# Altium PCB Keyboard.PcbDoc
Units mil, origin at the board's own origin, x right, y up, seen from the top; angles counter-clockwise.
Board outline 5753.22 x 3798.75 mil, 2 copper layers (Component Side, Bottom Layer), stack 12.8 mil thick; 43 components, 20 nets, 460 pads, 19 vias.
Unrouted connection lines stored in the file: 107.
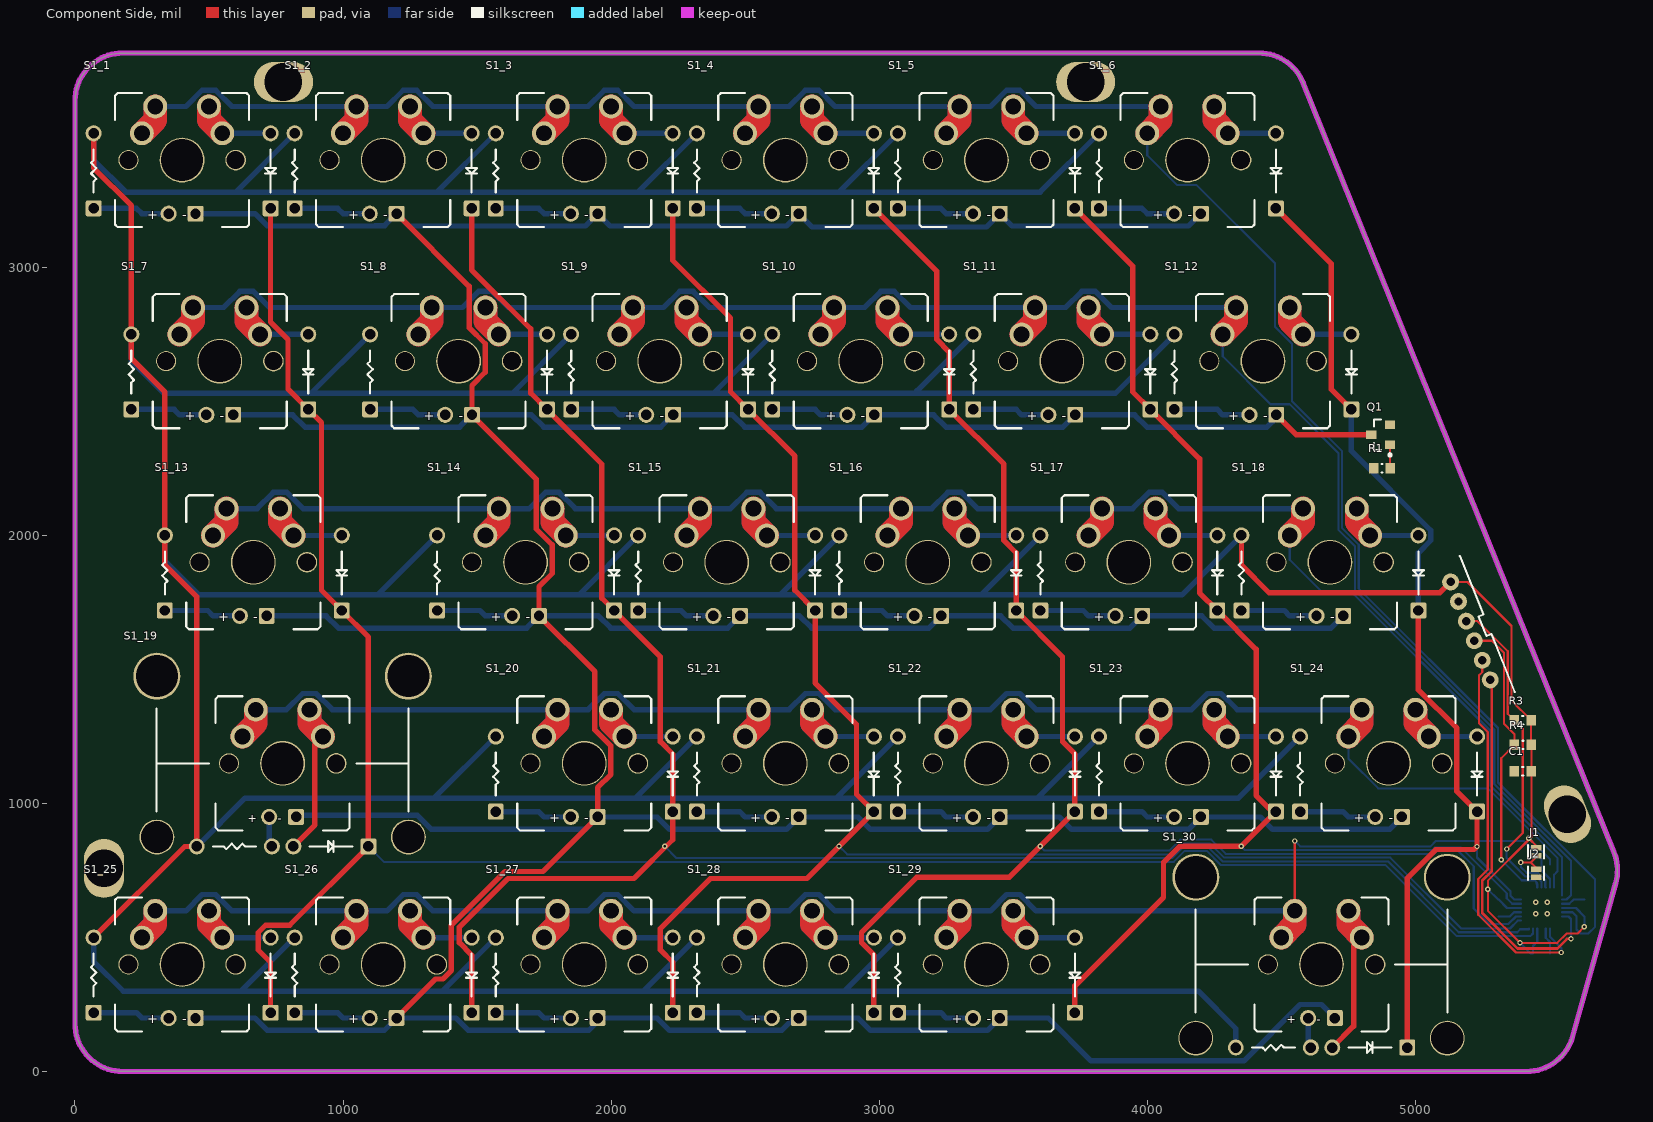
[diagram p0: Component Side view]
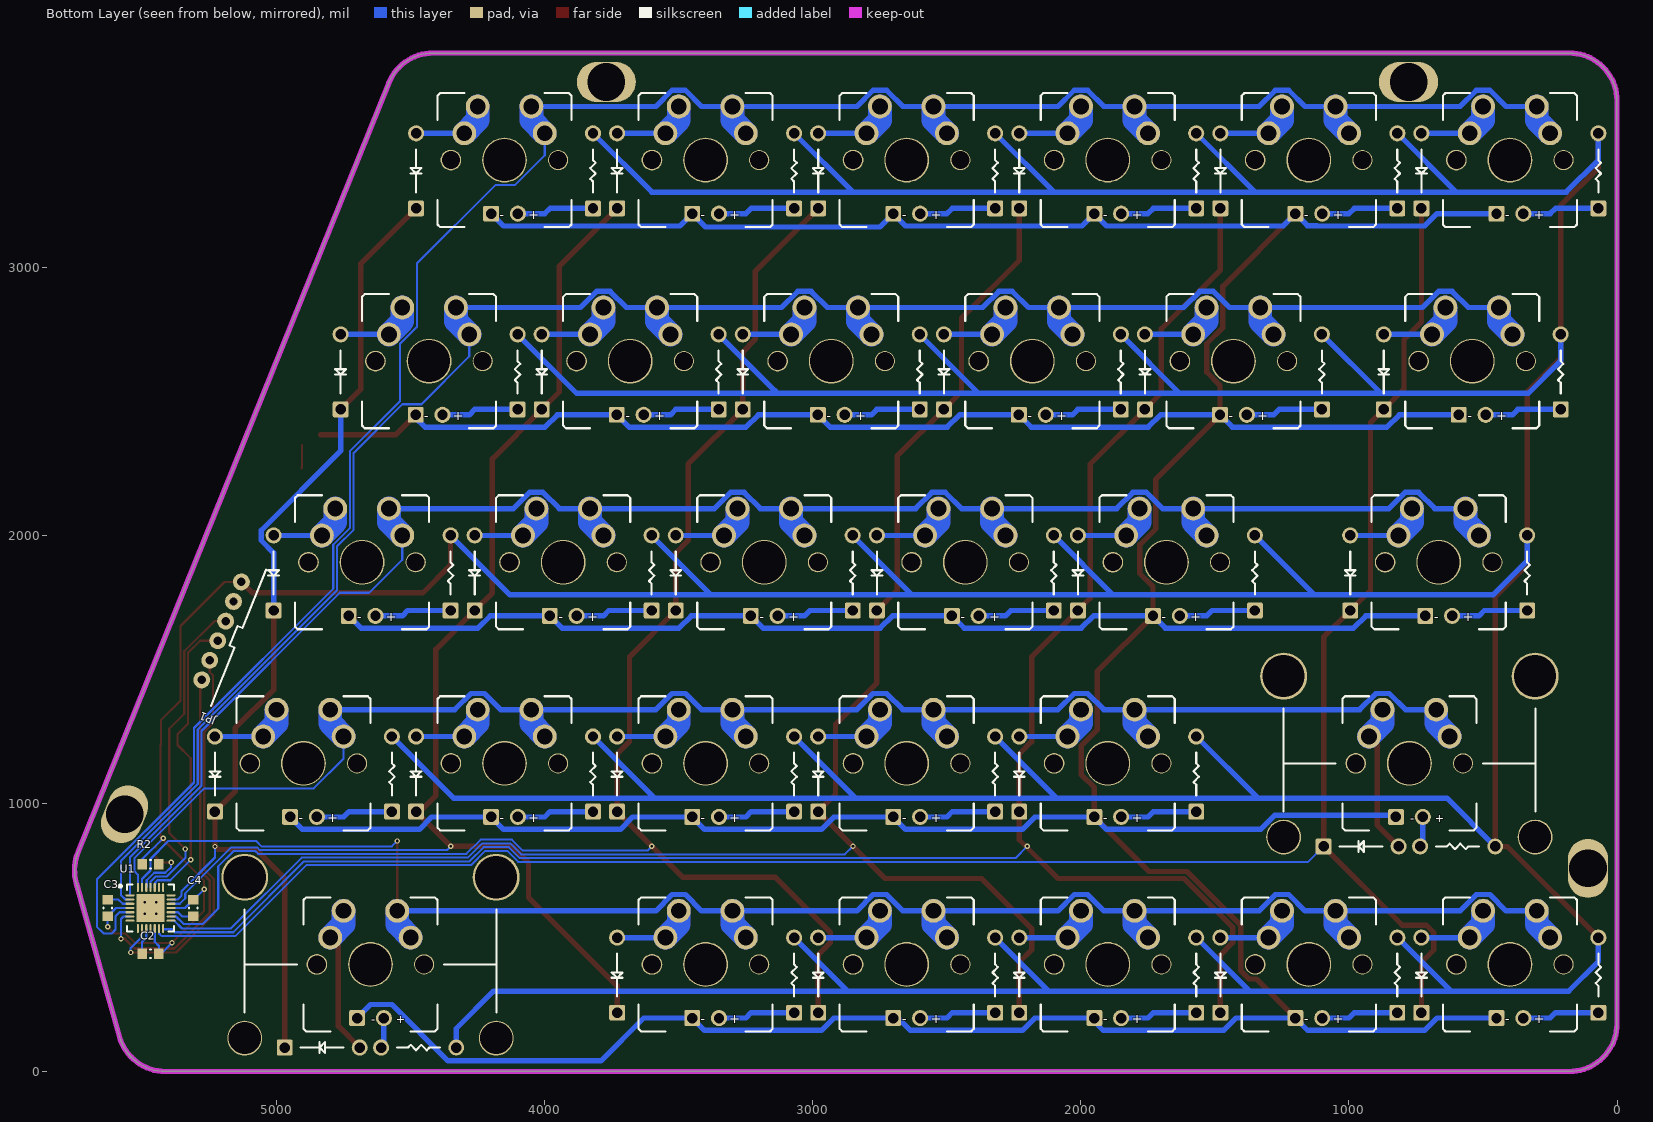
[diagram p1: Bottom Layer view, seen from below]
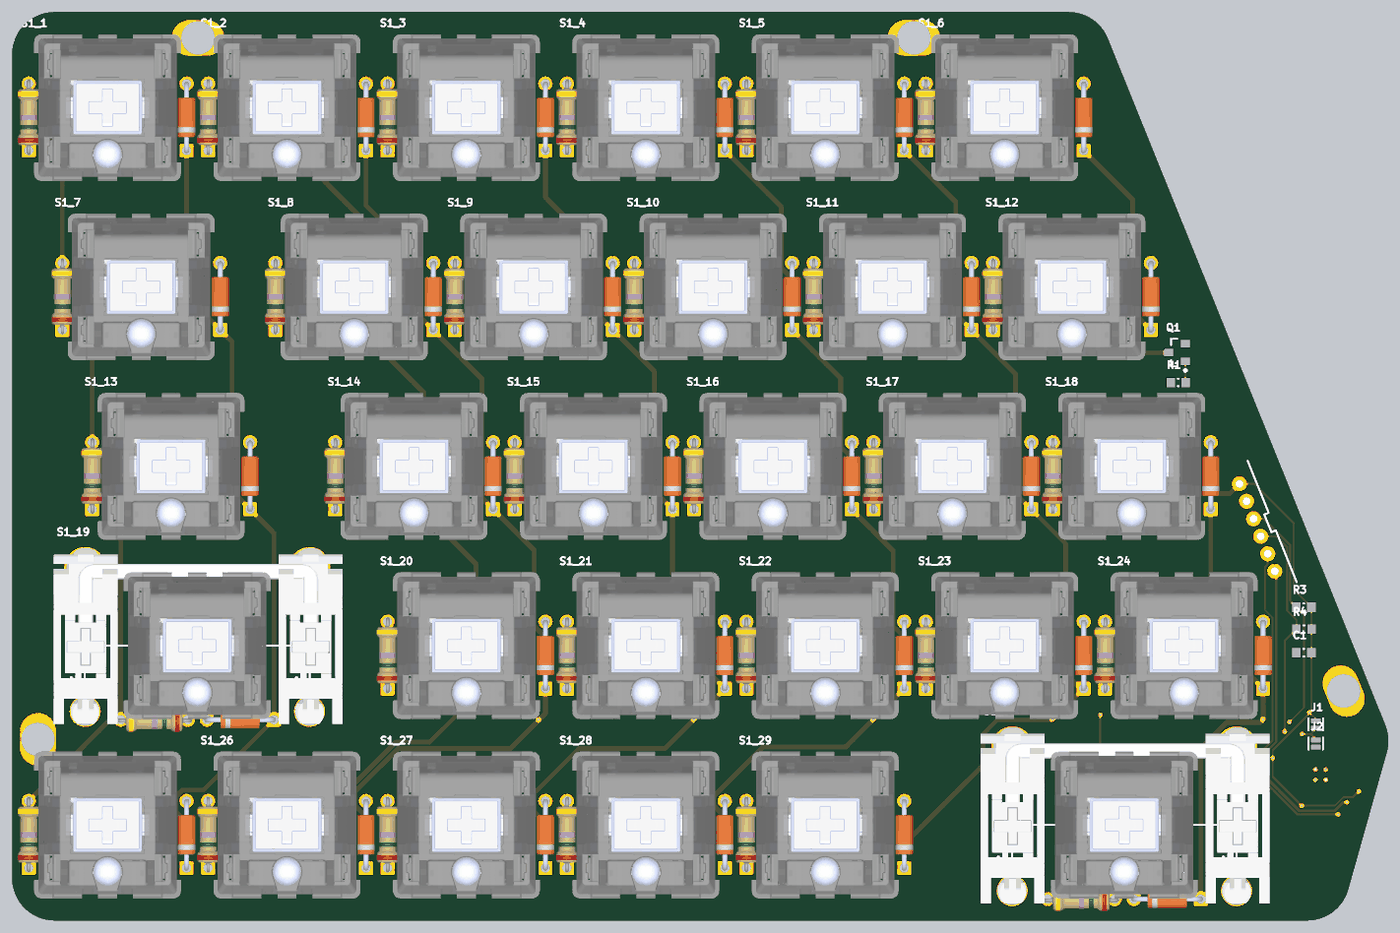
[diagram p2: 3D render of the assembled board from above, using the file's embedded part models]

## Layer stack, top to bottom
Top Solder: solder mask 0.4, Solder Resist, Dk 3.5
Component Side: signal copper 1.4
Dielectric 1: core 10, FR-4, Dk 4.2
Bottom Layer: signal copper 1.4
Solder Side: solder mask 0.4, Solder Resist, Dk 3.5

## Board outline
177.75,0.25 cw(c177.75,177.75) 0.25,177.75 0.25,3621.5 cw(c177.75,3621.5) 177.75,3799 4416.26,3799 cw(c4416.26,3621.5) 4580.83,3687.99 5740.58,817.51 cw(c5576,751.02) 5746.88,702.98 5585.7,129.71 cw(c5414.83,177.75) 5414.83,0.25

## Design rules (kind name [scope] priority, off if disabled: settings)
Clearance [All] p1: gap=6 ignorepadtopadclearanceinfootprint=FALSE except(0: Arc-Hole Track-Hole SMDPad-Hole THPad-Hole Via-Hole Fill-Hole Poly-Hole Region-Hole Text-Hole)
ComponentClearance [All] p1: gap=6 collisioncheckmode=3 verticalgap=10 showdistances=FALSE
PolygonConnect [All] p1: connectstyle=Relief reliefconductorwidth=10 reliefentries=4 polygonreliefangle="90 Angle" airgapwidth=10
RoutingVias [All] p1: holewidth=28 width=50 viastyle="Through Hole" minholewidth=28 minwidth=50 maxholewidth=28 maxwidth=50
SolderMaskExpansion [All] p1: expansion=3
Width [All] p1: maxlimit=1000 minlimit=6 preferedwidth=8 minimp=50.000000 maximp=50.000000 favimp=50.000000
29 further rules are at their usual default settings.

## Classes and differential pairs
component class Keyboard: C1 C2 C3 C4 C? J1 J2 JP1 Q1 R1 R2 R3 R4 U1
channel class Row: Switch1 Switch2 Switch3 Switch4 Switch5
net class ROW[1..5]: ROW1 ROW2 ROW3 ROW4 ROW5
net class COL[1..6]: COL1 COL2 COL3 COL4 COL5 COL6
component class Switch30: S1_30
component class Switch29: S1_29
component class Switch28: S1_28
component class Switch27: S1_27
component class Switch26: S1_26
component class Switch25: S1_25
component class Switch24: S1_24
component class Switch23: S1_23
component class Switch22: S1_22
component class Switch21: S1_21
component class Switch20: S1_20
component class Switch19: S1_19
component class Switch18: S1_18
component class Switch17: S1_17
component class Switch16: S1_16
component class Switch15: S1_15
component class Switch14: S1_14
component class Switch13: S1_13
component class Switch12: S1_12
component class Switch11: S1_11
component class Switch10: S1_10
component class Switch9: S1_9
component class Switch8: S1_8
component class Switch7: S1_7
component class Switch6: S1_6
component class Switch5: S1_5
component class Switch4: S1_4
component class Switch3: S1_3
component class Switch2: S1_2
component class Switch1: S1_1
channel class Switch: Switch

## Components (designator, comment, footprint, x,y, rotation, side; value= is the part's Value field where it differs from the comment)
C1 "2.2uF" CAPC0603(1608)100_N 5400,1120 r180 top
C2 "0.1uF" CAPC0603(1608)100_N 5470,440 r180 bottom value=100nF
C3 "0.1uF" CAPC0603(1608)100_N 5630,610 r270 bottom value=100nF
C4 "0.1uF" CAPC0603(1608)100_N 5310,610 r90 bottom value=100nF
J1 "ADDR_H" "SOLDER JUMPER" 5450,820 r90 top
J2 "ADDR_L" "SOLDER JUMPER" 5450,740 r90 top
JP1 "JST_PH_6_VERT" JST_PH_6_MIRRORABLE 5204.85,1643.26 r112 bottom
Q1 "IRLML2502TRPBF" INTR-SOT-23-3_V 4870,2375 r90 top
R1 "10K" RESC0603(1608)_N 4875,2250 r0 top value="10000.00 Ohm"
R2 "10K" RESC0603(1608)_N 5470,773 r0 bottom value="10000.00 Ohm"
R3 "10K" RESC0603(1608)_N 5400,1310 r180 top value="10000.00 Ohm"
R4 "10K" RESC0603(1608)_N 5400.8,1218.2 r180 top value="10000.00 Ohm"
S1_1 "CherryMX" CHERRYMX_MIRRORABLE 399.62,3399.62 r0 top locked (schematic designator S1)
S1_2 "CherryMX" CHERRYMX_MIRRORABLE 1149.62,3399.62 r0 top locked (schematic designator S1)
S1_3 "CherryMX" CHERRYMX_MIRRORABLE 1899.62,3399.62 r0 top locked (schematic designator S1)
S1_4 "CherryMX" CHERRYMX_MIRRORABLE 2649.62,3399.62 r0 top locked (schematic designator S1)
S1_5 "CherryMX" CHERRYMX_MIRRORABLE 3399.62,3399.62 r0 top locked (schematic designator S1)
S1_6 "CherryMX" CHERRYMX_MIRRORABLE 4149.62,3399.62 r0 top locked (schematic designator S1)
S1_7 "CherryMX" CHERRYMX_MIRRORABLE 540.25,2649.62 r0 top locked (schematic designator S1)
S1_8 "CherryMX" CHERRYMX_MIRRORABLE 1430.88,2649.62 r0 top locked (schematic designator S1)
S1_9 "CherryMX" CHERRYMX_MIRRORABLE 2180.88,2649.62 r0 top locked (schematic designator S1)
S1_10 "CherryMX" CHERRYMX_MIRRORABLE 2930.88,2649.62 r0 top locked (schematic designator S1)
S1_11 "CherryMX" CHERRYMX_MIRRORABLE 3680.88,2649.62 r0 top locked (schematic designator S1)
S1_12 "CherryMX" CHERRYMX_MIRRORABLE 4430.88,2649.62 r0 top locked (schematic designator S1)
S1_13 "CherryMX" CHERRYMX_MIRRORABLE 665.25,1899.62 r0 top locked (schematic designator S1)
S1_14 "CherryMX" CHERRYMX_MIRRORABLE 1680.88,1899.62 r0 top locked (schematic designator S1)
S1_15 "CherryMX" CHERRYMX_MIRRORABLE 2430.88,1899.62 r0 top locked (schematic designator S1)
S1_16 "CherryMX" CHERRYMX_MIRRORABLE 3180.88,1899.62 r0 top locked (schematic designator S1)
S1_17 "CherryMX" CHERRYMX_MIRRORABLE 3930.88,1899.62 r0 top locked (schematic designator S1)
S1_18 "CherryMX" CHERRYMX_MIRRORABLE 4680.88,1899.62 r0 top locked (schematic designator S1)
S1_19 "CherryMX" CherryMX_2U_Mirrorable 774.62,1149.62 r0 top locked (schematic designator S1)
S1_20 "CherryMX" CHERRYMX_MIRRORABLE 1899.62,1149.62 r0 top locked (schematic designator S1)
S1_21 "CherryMX" CHERRYMX_MIRRORABLE 2649.62,1149.62 r0 top locked (schematic designator S1)
S1_22 "CherryMX" CHERRYMX_MIRRORABLE 3399.62,1149.62 r0 top locked (schematic designator S1)
S1_23 "CherryMX" CHERRYMX_MIRRORABLE 4149.62,1149.62 r0 top locked (schematic designator S1)
S1_24 "CherryMX" CHERRYMX_MIRRORABLE 4899.62,1149.62 r0 top locked (schematic designator S1)
S1_25 "CherryMX" CHERRYMX_MIRRORABLE 399.62,399.62 r0 top locked (schematic designator S1)
S1_26 "CherryMX" CHERRYMX_MIRRORABLE 1149.62,399.62 r0 top locked (schematic designator S1)
S1_27 "CherryMX" CHERRYMX_MIRRORABLE 1899.62,399.62 r0 top locked (schematic designator S1)
S1_28 "CherryMX" CHERRYMX_MIRRORABLE 2649.62,399.62 r0 top locked (schematic designator S1)
S1_29 "CherryMX" CHERRYMX_MIRRORABLE 3399.62,399.62 r0 top locked (schematic designator S1)
S1_30 "CherryMX" CherryMX_2U_Mirrorable 4649.62,399.62 r0 top locked (schematic designator S1)
U1 "SX1509" QFN_UT_28 5470,610 r180 bottom

## Footprints (in the part's own frame and the unit in brackets; to place one, negate y for a bottom-side part, rotate by r counter-clockwise, add the part's x,y. Pads: shape width x height; smd on the part's side, far side on the other; paste and mask are expansions set on the pad)
CAPC0603(1608)100_N [mm] "Chip Capacitor, Body 1.6x0.8mm, Height 1.0mm, IPC Medium Density"
  rect 0.9x1 smd: 1(-0.8,0) 2(0.8,0)
  silkscreen extent -0.05,-0.4 0.05,0.4, body extent -0.87,-0.48 0.88,0.47, height 1
CherryMX_2U_Mirrorable [mil]
  round 130 hole 120: 1(-469,-275) 1(469,-275)
  round 175 hole 157: 1(-469,325) 1(469,325)
  round 75 hole 67: 1(-200,0)
  round 167 hole 157: 1(0,0)
  round 77 hole 67: 1(200,0)
  round 89 hole 59: 2(-150,100) 2(-100,200) ""(100,200) ""(150,100)
  rrect20% 59x59 hole 39: 3(320,-310) 5(50,-200)
  round 59 hole 39: 4(-320,-310)
  round 60 hole 39: ""(-50,-200) ""(-40,-310) ""(40,-310)
  Component Side lines w20: 40,-310 120,-230 120,-50 120,70
  Component Side lines w89: -150,100 -100,150 -100,200 ; 100,200 100,150 150,100
  Bottom Layer lines w20: -50,-200 -50,-300 -40,-310
  Bottom Layer lines w89: -150,100 -100,150 -100,200 ; 100,200 100,150 150,100
  silkscreen extent -470,-330 470,250, body extent -601,-360 608,428, height 620
CHERRYMX_MIRRORABLE [mil]
  round 75 hole 67: 1(-200,0)
  round 167 hole 157: 1(0,0)
  round 77 hole 67: 1(200,0)
  round 89 hole 59: 2(-150,100) 2(-100,200) ""(100,200) ""(150,100)
  rrect20% 59x59 hole 39: 3(330,-180) 5(50,-200) ""(-330,-180)
  round 60 hole 39: 4(-330,100) ""(-50,-200) ""(330,100)
  Component Side lines w89: -150,100 -100,150 -100,200 ; 100,200 100,150 150,100
  Bottom Layer lines w20: -330,-180 -170,-180 -150,-200 -50,-200 ; 150,100 330,100
  Bottom Layer lines w89: -150,100 -100,150 -100,200 ; 100,200 100,150 150,100
  silkscreen extent -340,-250 350,250, body extent -375,-307 366,307, height 620
INTR-SOT-23-3_V [mm] "SOT23, 3-Leads, Body 2.92x1.3mm, Pitch 1.9mm"
  rect 0.802x0.972 smd: 1(-0.95,-0.885) 2(0.95,-0.885) 3(0,0.885)
  silkscreen extent -2.03,-1.01 1.46,0.64, body extent -1.46,-0.65 1.46,0.65, height 1.12
JST_PH_6_MIRRORABLE [mil]
  round 63 hole 31.5: 1(-196.85,0) 2(-118.11,0) 3(-39.37,0) 4(39.63,0) 5(118.63,0) 6(197.37,0)
  silkscreen extent -274,-68 274,-48, body extent -274,-67 274,110, height 236
QFN_UT_28 [mm]
  oval 0.85x0.2 smd: 1(-1.95,1.2) 2(-1.95,0.8) 3(-1.95,0.4) 4(-1.95,0) 5(-1.95,-0.4) 6(-1.95,-0.8) 7(-1.95,-1.2) 15(1.95,-1.2) 16(1.95,-0.8) 17(1.95,-0.4) 18(1.95,0) 19(1.95,0.4) 20(1.95,0.8) 21(1.95,1.2)
  oval 0.2x0.85 smd: 8(-1.2,-1.95) 9(-0.8,-1.95) 10(-0.4,-1.95) 11(0,-1.95) 12(0.4,-1.95) 13(0.8,-1.95) 14(1.2,-1.95) 22(1.2,1.95) 23(0.8,1.95) 24(0.4,1.95) 25(0,1.95) 26(-0.4,1.95) 27(-0.8,1.95) 28(-1.2,1.95)
  rect 2.65x2.65 smd: 29(0,0)
  silkscreen extent -3,-2.22 2.22,2.23, body extent -2.08,-2.08 2.09,2.08, height 0.6
RESC0603(1608)_N [mm] "Chip Resistor, Body 1.6x0.8mm, IPC Medium Density"
  rect 0.9x1 smd: 1(-0.8,0) 2(0.8,0)
  silkscreen extent -0.05,-0.4 0.05,0.4, body extent -0.85,-0.47 0.85,0.47, height 0.6
"SOLDER JUMPER" [mil]
  rrect20% 20x40 smd: 1(-15,0) 2(15,0)
  silkscreen extent -25,-30 25,30

## Part data
C1: library part CMP-1035-02767-1, "CAP 2.2uF 25V ±10% 0603 (1608 Metric) Thickness 1mm SMD", Case-EIA=0603, Case-Metric=1608, Rated Voltage="25 V", Tolerance=±10%, Max Thickness="1 mm", Technology=SMT
C2 C3 C4: library part CMP-1035-02595-1, "CAP 100nF 100V ±10% 0603 (1608 Metric) Thickness 1mm SMD", Case-EIA=0603, Case-Metric=1608, Rated Voltage="100 V", Tolerance=±10%, Max Thickness="1 mm", Technology=SMT
J1 J2: library part "Solder Jumper"
JP1: Manufacturer="JST Sales America Inc.", PartNumber=B6B-PH-K-S(LF)(SN), Mounting Technology="Through Hole", PackageReference=JST-PH
Q1: library part CMP-2000-04985-1, "N-Channel HEXFET(R) Power MOSFET, 20 V VDS, +/- 12 V VGS, 4.2 A, 3-Pin SOT23, RoHS, Tape and Reel", Drain-Source On Resistance-Max=0.045O, Drain-to-Source Voltage [Vdss]=20V, Manufacturer="International Rectifier", Package Description="3-Pin Small Outline Transistor, Body 2.92 x 1.3 mm, Pitch 0.95 mm", Package Reference=SOT-23-3, Rated Power Dissipation=1.25W, Channel Type=N-Channel, Datasheet URL=https://datasheet.ciiva.com/6383/irlml2502pbf-6383216.pdf, Datasheet Version=Apr-14, Manufacturer URL=http://internationalrectifier.com/, Qg Gate Charge=8nC
R1 R2 R3 R4: library part CMP-1012-00098-1, "10K 0.1W 5% 0603 (1608 Metric)  SMD", Case-EIA=0603, Case-Metric=1608, Power="0.1 W", Tolerance="5 %", Technology=SMT
U1: Supplier Part Number 1=947-SX1509BIULTRT, Supplier 1=Mouser, Supplier 2=Digi-Key, Supplier 3=Digi-Key, Supplier Part Number 2=SX1509BIULDKR-ND, Supplier Part Number 3=SX1509BIULCT-ND

## Free pads (board coordinates)
  oval 150x220 hole 140: 33(108.36,757.65)
  oval 220x150 hole 140: ""(777.65,3690.89) ""(3769.78,3690.89)
  oval 220x150 hole 140 rot 112: ""(5566.6,959.53)

## Via types
v1: diameter 20, hole 10, Component Side to Bottom Layer, 19 vias

## Nets (pads, with @x,y where several pads share a name; then routed paths per layer and width w, separated by ;. In a path a pad name is that pad's centre, name@x,y a point inside that pad or via, vN(x,y) a via of type N, cw(c..) or ccw(c..) an arc to the next point about the centre after c; other vN are vias at no path point)
COL1: S1_1.3 S1_7.3 S1_13.3 S1_19.3 S1_25.3 U1.13 | length 7932.1
  Component Side w20: S1_25.3 729.62,407.62 683.62,453.62 683.62,518.68 710.57,545.62 800.62,545.62 S1_19.3 1094.62,1620.25 S1_13.3 919.75,1795.12 919.75,2420.12 S1_7.3 794.75,2545.12 794.75,2730.68 729.62,2795.81 S1_1.3
  Bottom Layer w8: S1_19.3 1152.25,782 4098.7,782 4139.82,823.12 4221.43,823.12 4274.55,770 4888.7,770 5153.7,505 5428.45,505 5438.5,515.06 U1.13
COL2: S1_2.3 S1_8.3 S1_14.3 S1_20.3 S1_26.3 U1.14 | length 7331.1
  Component Side w20: S1_26.3 1479.62,434.57 1433.62,480.57 1433.62,538.62 1615,720 2085,720 2229.62,864.62 S1_20.3 2229.62,1184.57 2183.62,1230.57 2183.62,1546.88 S1_14.3 1964.88,1765.62 1964.88,2265.62 S1_8.3 1700,2530.5 1700,2770 1479.62,2990.38 S1_2.3
  Bottom Layer w8: v1(2200,840) 2244,796 4092.9,796 4134.03,837.12 4227.22,837.12 4280.35,784 4897.32,784 5161.54,519.79 5379.79,519.79 5391.02,531.02 5422.76,531.02 U1.14
COL3: S1_3.3 S1_9.3 S1_15.3 S1_21.3 S1_27.3 U1.15 | length 6586.4
  Component Side w20: S1_27.3 2229.62,407.62 2183.62,453.62 2183.62,533.62 2370,720 2730,720 v1(2850,840) S1_21.3 2915,1034.25 2915,1295 2760.88,1449.12 S1_15.3 2685.38,1795.12 2685.38,2295.12 S1_9.3 2445,2535.5 2445,2810 2229.62,3025.38 S1_3.3
  Bottom Layer w8: v1(2850,840) 2880,810 4087.1,810 4128.23,851.12 4233.02,851.12 4286.15,798 4905.95,798 5170.16,533.79 5352.58,533.79 5381.55,562.76 U1.15
COL4: S1_4.3 S1_10.3 S1_16.3 S1_22.3 S1_28.3 U1.16 | length 5920.8
  Component Side w20: S1_28.3 2979.62,434.57 2933.62,480.57 2933.62,518.68 3139.95,725 3485,725 v1(3600,840) S1_22.3 3729.62,1184.57 3683.62,1230.57 3683.62,1546.88 S1_16.3 3510.88,1934.57 3464.88,1980.57 3464.88,2265.62 S1_10.3 3260.88,2684.57 3214.88,2730.57 3214.88,2984.38 S1_4.3
  Bottom Layer w8: v1(3600,840) 3616,824 4081.3,824 4122.43,865.12 4238.82,865.12 4291.95,812 5068.11,812 5078.24,822.12 5160.43,822.12 5217.12,765.42 5217.12,607.88 5274.21,550.79 5346.96,550.79 5374.67,578.5 U1.16
COL5: S1_5.3 S1_11.3 S1_17.3 S1_23.3 S1_29.3 U1.19 | length 4915.6
  Component Side w20: S1_29.3 3729.62,319.62 4060,650 4060,780 4120,840 v1(4350,840) S1_23.3 4465.38,969.62 4405.5,1029.5 4405.5,1575 S1_17.3 4195,1785.5 4195,2285.5 S1_11.3 3945,2535.5 3945,3004.25 S1_5.3
  Bottom Layer w8: v1(4350,840) 4364,826 5062.32,826 5072.44,836.12 5169.05,836.12 5340.69,664.49 5340.69,645.98 5360.92,625.75 U1.19
COL6: S1_6.3 S1_12.3 S1_18.3 S1_24.3 S1_30.3 U1.20 | length 3950.3
  Component Side w20: S1_6.3 4685.38,3013.88 4685.38,2545.12 S1_12.3 ; S1_30.3 4969.62,722 5075.75,828.12 5218.12,828.12 v1(5229.62,839.62) S1_24.3 5154.12,1045.12 5154.12,1280.68 5010.88,1423.93 S1_18.3
  Bottom Layer w8: v1(5229.62,839.62) 5229.62,798.18 5354.69,673.12 5354.69,655.16 5368.35,641.5 U1.20
  Bottom Layer w20: S1_12.3 4760.88,2314.68 5056.88,2018.68 5056.88,1980.57 5010.88,1934.57 S1_18.3
GND: C1.2 C2.1 C3.1 C4.1 J2.1 JP1.5 Q1.2 R1.1 S1_1.1 S1_2.1 S1_3.1 S1_4.1 S1_5.1 S1_6.1 S1_7.1 S1_8.1 S1_9.1 S1_10.1 S1_11.1 S1_12.1 S1_13.1 S1_14.1 S1_15.1 S1_16.1 S1_17.1 S1_18.1 S1_19.1 S1_20.1 S1_21.1 S1_22.1 S1_23.1 S1_24.1 S1_25.1 S1_26.1 S1_27.1 S1_28.1 S1_29.1 S1_30.1 U1.3 U1.10 U1.17 | length 279.1
  Bottom Layer w8: C4.1 5352.05,578.5 5367.54,594 U1.17@5393.23,594 ; U1.10 5485.75,499.25 5501.5,483.5 C2.1 ; U1.3 5574.09,625.75 5589.84,641.5 C3.1
LED_GATE: JP1.1 Q1.1 R1.2 U1.6 | length 1487
  Component Side w8: Q1.1 4904.84,2251.65 R1.2
  Component Side w10: JP1.1 5284.62,1454.7 5284.62,747.55 5249,711.93 5249,591.3 5381.3,459 5529.3,459 5565.3,495 v1(5580,495)
  Bottom Layer w8: U1.6 5570.79,578.5 5580,569.3 v1(5580,495)
NetJ1_1: J1.1 J2.2 U1.26 | length 253.9
  Component Side w8: v1(5393.23,780) 5430,780 ; J2.2 5450,760 5430,780 ; J1.1@5450,800 5430,780
  Bottom Layer w8: v1(5393.23,780) 5393.23,763.16 5414.88,741.5 5455.87,741.5 5484,713.38 5484,688.52 U1.26
NetQ1_3: Q1.3 S1_1.5 S1_2.5 S1_3.5 S1_4.5 S1_5.5 S1_6.5 S1_7.5 S1_8.5 S1_9.5 S1_10.5 S1_11.5 S1_12.5 S1_13.5 S1_14.5 S1_15.5 S1_16.5 S1_17.5 S1_18.5 S1_19.5 S1_20.5 S1_21.5 S1_22.5 S1_23.5 S1_24.5 S1_25.5 S1_26.5 S1_27.5 S1_28.5 S1_29.5 S1_30.5 | length 25373.9
  Component Side w20: S1_26.5 1345.12,345.12 1372.2,345.12 1404.12,377.05 1404.12,545.89 1604.23,746 1746,746 S1_20.5 1949.62,1058.91 1999.12,1108.41 1999.12,1214.57 1939.12,1274.57 1939.12,1491.38 S1_14.5 1730.88,1808.91 1780.38,1858.41 1780.38,1964.57 1720.38,2024.57 1720.38,2210.12 S1_8.5 1480.88,2558.91 1530.38,2608.41 1530.38,2714.57 1470.38,2774.57 1470.38,2928.88 S1_2.5 ; S1_12.5 4555.5,2375 Q1.3
  Bottom Layer w20: S1_25.5 671.45,199.62 717.45,153.62 1153.62,153.62 S1_26.5 1421.45,199.62 1467.45,153.62 1916.38,153.62 1949.62,186.88 S1_27.5 2171.45,199.62 2217.45,153.62 2636,153.62 2682,199.62 S1_28.5 2921.45,199.62 2967.45,153.62 3403.62,153.62 S1_29.5 3630.38,199.62 3790,40 4359.62,40 4569.62,250 4649.25,250 S1_30.5 ; S1_1.5 671.45,3199.62 717.45,3153.62 1118.68,3153.62 1120.05,3155 1155,3155 S1_2.5 1245.62,3153.62 1903.62,3153.62 S1_3.5 1995.62,3153.62 2653.62,3153.62 S1_4.5 2749.25,3150 3400,3150 S1_5.5 3495.62,3153.62 4153.62,3153.62 S1_6.5 ; S1_7.5 812.08,2449.62 858.08,2403.62 1434.88,2403.62 S1_8.5 1702.7,2449.62 1748.7,2403.62 2184.88,2403.62 S1_9.5 2452.7,2449.62 2498.7,2403.62 2934.88,2403.62 S1_10.5 3202.7,2449.62 3248.7,2403.62 3684.88,2403.62 S1_11.5 3952.7,2449.62 3998.7,2403.62 4446.38,2403.62 4480.88,2438.12 S1_12.5 ; S1_13.5 937.08,1699.62 983.08,1653.62 1684.88,1653.62 S1_14.5 1952.7,1699.62 1998.7,1653.62 2434.88,1653.62 S1_15.5 2702.7,1699.62 2748.7,1653.62 3184.88,1653.62 S1_16.5 3452.7,1699.62 3498.7,1653.62 3934.88,1653.62 S1_17.5 4202.7,1699.62 4248.7,1653.62 4684.88,1653.62 S1_18.5 ; S1_19.5 824.62,955.62 1277.18,955.62 1329.18,903.62 1903.62,903.62 S1_20.5 2171.45,949.62 2217.45,903.62 2653.62,903.62 S1_21.5 2921.45,949.62 2967.45,903.62 3403.62,903.62 S1_22.5 3671.45,949.62 3717.45,903.62 4153.62,903.62 S1_23.5 4421.45,949.62 4467.45,903.62 4903.62,903.62 S1_24.5
NetR2_1: R2.1 U1.23
NINT: JP1.2 U1.9 | length 1457.1
  Component Side w8: JP1.2 5249.09,1489.93 5237.09,1477.93 5237.09,1298.73 5269.62,1266.19 5269.62,753.77 5234,718.14 5234,585.09 5375.09,444 v1(5544,444)
  Bottom Layer w8: U1.9 5501.5,503.3 5544,460.8 v1(5544,444)
ROW1: S1_1.2 S1_2.2 S1_3.2 S1_4.2 S1_5.2 S1_6.2 U1.5 | length 7890.6
  Bottom Layer w8: S1_6.2@3999.62,3499.62 3999.62,3417.4 4110.9,3306.12 4183.88,3306.12 4476.38,3013.62 4476.38,2777.05 4540,2713.43 4540,2499.42 4726.38,2313.05 4726.38,2027.05 4788.38,1965.05 4788.38,1801.22 5308,1281.6 5308,1078.2 5670,716.2 5670,540 5645,515 5615,515 5600.31,529.69 5600.31,579.69 5585.75,594.25 U1.5
  Bottom Layer w20: S1_1.2@299.62,3599.62 414.07,3599.62 474.57,3660.12 524.68,3660.12 585.18,3599.62 1049.62,3599.62 1164.07,3599.62 1224.57,3660.12 1274.68,3660.12 1335.18,3599.62 1799.62,3599.62 1914.07,3599.62 1974.57,3660.12 2024.68,3660.12 2085.18,3599.62 2549.62,3599.62 2664.07,3599.62 2724.57,3660.12 2774.68,3660.12 2835.18,3599.62 3299.62,3599.62 3414.07,3599.62 3474.57,3660.12 3524.68,3660.12 3585.18,3599.62 S1_6.2@4049.62,3599.62
ROW2: S1_7.2 S1_8.2 S1_9.2 S1_10.2 S1_11.2 S1_12.2 U1.2 | length 6852.9
  Bottom Layer w8: S1_12.2@4280.88,2749.62 4280.88,2667.4 4459.15,2489.12 4530.5,2489.12 4712.38,2307.25 4712.38,2021.25 4774.38,1959.25 4774.38,1795.42 5294,1275.8 5294,1072.4 5580.09,786.32 5580.09,658.06 5563.53,641.5 U1.2
  Bottom Layer w20: S1_7.2@440.25,2849.62 554.69,2849.62 615.19,2910.12 665.31,2910.12 725.81,2849.62 1330.88,2849.62 1445.32,2849.62 1505.82,2910.12 1555.93,2910.12 1616.43,2849.62 2080.88,2849.62 2195.32,2849.62 2255.82,2910.12 2305.93,2910.12 2366.43,2849.62 2830.88,2849.62 2945.32,2849.62 3005.82,2910.12 3055.93,2910.12 3116.43,2849.62 3580.88,2849.62 3695.32,2849.62 3755.82,2910.12 3805.93,2910.12 3866.43,2849.62 S1_12.2@4330.88,2849.62
ROW3: S1_13.2 S1_14.2 S1_15.2 S1_16.2 S1_17.2 S1_18.2 U1.1 | length 6093.8
  Bottom Layer w8: S1_18.2@4530.88,1999.62 4530.88,1909.12 4654.4,1785.6 4764.4,1785.6 5280,1270 5280,1066.61 5546.77,799.83 U1.1
  Bottom Layer w20: S1_13.2@565.25,2099.62 679.69,2099.62 740.19,2160.12 790.31,2160.12 850.81,2099.62 1580.88,2099.62 1695.32,2099.62 1755.82,2160.12 1805.93,2160.12 1866.43,2099.62 2330.88,2099.62 2445.32,2099.62 2505.82,2160.12 2555.93,2160.12 2616.43,2099.62 3080.88,2099.62 3195.32,2099.62 3255.82,2160.12 3305.93,2160.12 3366.43,2099.62 3830.88,2099.62 3945.32,2099.62 4005.82,2160.12 4055.93,2160.12 4116.43,2099.62 S1_18.2@4580.88,2099.62
ROW4: S1_19.2 S1_20.2 S1_21.2 S1_22.2 S1_23.2 S1_24.2 U1.28 | length 5505.9
  Bottom Layer w8: S1_24.2@4749.62,1249.62 4749.62,1167.4 4860.9,1056.12 5269.91,1056.12 5529.21,796.83 5529.21,746.17 5517.24,734.2 U1.28
  Bottom Layer w20: S1_19.2@674.62,1349.62 789.07,1349.62 849.57,1410.12 899.68,1410.12 960.18,1349.62 1799.62,1349.62 1914.07,1349.62 1974.57,1410.12 2024.68,1410.12 2085.18,1349.62 2549.62,1349.62 2664.07,1349.62 2724.57,1410.12 2774.68,1410.12 2835.18,1349.62 3299.62,1349.62 3414.07,1349.62 3474.57,1410.12 3524.68,1410.12 3585.18,1349.62 4049.62,1349.62 4164.07,1349.62 4224.57,1410.12 4274.68,1410.12 4335.18,1349.62 S1_24.2@4799.62,1349.62
ROW5: S1_25.2 S1_26.2 S1_27.2 S1_28.2 S1_29.2 S1_30.2 U1.27 | length 5844.7
  Component Side w8: S1_30.2@4549.62,599.62 v1(4549.62,860)
  Bottom Layer w8: v1(4549.62,860) 4569.62,840 5056.52,840 5076.14,859.62 5403.42,859.62 5470,793.05 5470,749.95 5501.5,718.46 U1.27
  Bottom Layer w20: S1_25.2@299.62,599.62 414.07,599.62 474.57,660.12 524.68,660.12 585.18,599.62 1049.62,599.62 1164.07,599.62 1224.57,660.12 1274.68,660.12 1335.18,599.62 1799.62,599.62 1914.07,599.62 1974.57,660.12 2024.68,660.12 2085.18,599.62 2549.62,599.62 2664.07,599.62 2724.57,660.12 2774.68,660.12 2835.18,599.62 3299.62,599.62 3414.07,599.62 3474.57,660.12 3524.68,660.12 3585.18,599.62 S1_30.2@4549.62,599.62
SCL: JP1.4 R3.2 U1.25 | length 1207.3
  Component Side w8: JP1.4 5231.61,1680 5344,1567.61 5344,1334.5 R3.2 5400,1278.5 5400,890 v1(5340,830)
  Bottom Layer w8: v1(5340,830) 5340,796.58 5409.08,727.5 5450.08,727.5 5470,707.58 U1.25
SDA: JP1.3 R4.2 U1.24 | length 1124.4
  Component Side w8: JP1.3 5285.06,1606.75 5330,1561.81 5330,1296.96 5369.3,1257.66 R4.2 5320,1168.9 v1(5320,790)
  Bottom Layer w8: v1(5320,790) 5396.5,713.5 5444.28,713.5 5452.44,705.34 5452.44,700.28 5454.25,698.47 U1.24
VCC: C1.1 C2.2 C3.2 C4.2 J1.2 JP1.6 R2.2 R3.1 R4.1 S1_1.4 S1_2.4 S1_3.4 S1_4.4 S1_5.4 S1_6.4 S1_7.4 S1_8.4 S1_9.4 S1_10.4 S1_11.4 S1_12.4 S1_13.4 S1_14.4 S1_15.4 S1_16.4 S1_17.4 S1_18.4 S1_19.4 S1_20.4 S1_21.4 S1_22.4 S1_23.4 S1_24.4 S1_25.4 S1_26.4 S1_27.4 S1_28.4 S1_29.4 S1_30.4 U1.4 U1.12 U1.18 | length 34149.9
  Component Side w8: JP1.6 5193.75,1826.25 5358.1,1661.9 5358.1,1383.4 R3.1 5431.5,1219 R4.1 5432.29,874.01 ; v1(5422.76,870) v1@5425.52,867.24 ; J1.2 5450,842.76 v1@5425.52,867.24 ; v1(5630,540) 5605,515 5564.09,515 5529.09,480 v1(5390,480) 5270,600 v1(5270,680) 5270,711.72 v1@5425.52,867.24
  Component Side w20: S1_25.4 409.62,839.62 S1_19.4 454.62,1770.62 335.25,1890 S1_13.4 335.25,2534.75 210.25,2659.75 S1_7.4 210.25,3229.75 69.62,3370.38 S1_1.4 ; S1_18.4 4350.88,1889.12 4454.5,1785.5 5090.16,1785.5 JP1.6
  Bottom Layer w8: v1(5270,680) 5308.5,641.5 C4.2 5341.5,610 U1.18 ; v1(5390,480) 5430,440 C2.2 5438.5,468.5 5454.25,484.25 U1.12 ; v1(5422.76,870) 5501.5,791.26 R2.2 ; U1.4 5598.5,610 C3.2 v1(5630,540)
  Bottom Layer w20: S1_25.4 69.62,410.62 180.12,300.12 620.12,300.12 ; S1_1.4 69.62,3400.38 190,3280 600,3280 ; S1_7.4 210.25,2649.88 330.12,2530 881.25,2530 ; S1_13.4 335.25,1904.75 461.99,1778.01 1129.26,1778.01 ; S1_19.4 635,1020 1340,1020 ; S1_26.4 620.12,300.12 ; S1_2.4 600,3280 ; S1_8.4 881.25,2530 ; S1_14.4 1129.26,1778.01 ; S1_27.4 1370.12,300.12 ; S1_20.4 1340,1020 ; S1_3.4 1350,3280 ; S1_9.4 1631.25,2530 ; S1_15.4 1879.26,1778.01 ; S1_28.4 2120.12,300.12 ; S1_21.4 2090,1020 ; S1_4.4 2100,3280 ; S1_10.4 2381.25,2530 ; S1_16.4 2629.26,1778.01 ; S1_29.4 2870.12,300.12 ; S1_22.4 2840,1020 ; S1_5.4 2850,3280 ; S1_11.4 3140,2538.75 3140,2530 ; S1_17.4 3379.26,1778.01 ; S1_23.4 3590,1020 ; S1_6.4 3600,3280 2850,3280 ; S1_12.4 3881.25,2530 3140,2530 ; S1_30.4 4329.62,160.38 4189.88,300.12 2870.12,300.12 ; S1_18.4 4129.26,1778.01 3379.26,1778.01 ; S1_24.4 4340,1020 3590,1020 ; 600,3280 1350,3280 ; 620.12,300.12 1370.12,300.12 ; 881.25,2530 1631.25,2530 ; 1129.26,1778.01 1879.26,1778.01 ; 1340,1020 2090,1020 ; 1350,3280 2100,3280 ; 1370.12,300.12 2120.12,300.12 ; 1631.25,2530 2381.25,2530 ; 1879.26,1778.01 2629.26,1778.01 ; 2090,1020 2840,1020 ; 2100,3280 2850,3280 ; 2120.12,300.12 2870.12,300.12 ; 2381.25,2530 3140,2530 ; 2629.26,1778.01 3379.26,1778.01 ; 2840,1020 3590,1020
pads on no net: S1_1. S1_2. S1_3. S1_4. S1_5. S1_6. S1_7. S1_8. S1_9. S1_10. S1_11. S1_12. S1_13. S1_14. S1_15. S1_16. S1_17. S1_18. S1_19. S1_20. S1_21. S1_22. S1_23. S1_24. S1_25. S1_26. S1_27. S1_28. S1_29. S1_30. U1.7 U1.8 U1.11 U1.21 U1.22 U1.29
copper on no net:
  other v1: 5448.35,588.35 5491.65,588.35 5448.35,631.65 5491.65,631.65

## Keep-outs
Keep-Out Layer:
  lines w20: 4580.83,3687.99 ccw(c4416.26,3621.5) 4416.26,3799 177.75,3799 ccw(c177.75,3621.5) 0.25,3621.5 0.25,177.75 ccw(c177.75,177.75) 177.75,0.25 5414.83,0.25 ccw(c5414.83,177.75) 5585.7,129.71 ; 4580.83,3687.99 5740.58,817.51 ; 4580.83,3687.99 4580.83,3687.99 ; 5585.7,129.71 5585.7,129.71 ; 5585.7,129.71 5746.88,702.98 ccw(c5576,751.02) 5740.58,817.51 ; 5740.58,817.51 5740.58,817.51

## Silkscreen, mask and mechanical layers (free items; w line width, h text height)
Mechanical 1:
  circle w10: c2649.62,3399.62 r10
  circle w10: c399.62,3399.62 r10
  circle w10: c1149.62,3399.62 r10
  circle w10: c1899.62,3399.62 r10
  circle w10: c3399.62,3399.62 r10
  circle w10: c4149.62,3399.62 r10
  circle w10: c4430.88,2649.62 r10
  circle w10: c3680.88,2649.62 r10
  circle w10: c2930.88,2649.62 r10
  circle w10: c2180.88,2649.62 r10
  circle w10: c1430.88,2649.62 r10
  circle w10: c540.25,2649.62 r10
  circle w10: c665.25,1899.62 r10
  circle w10: c1680.88,1899.62 r10
  circle w10: c2430.88,1899.62 r10
  circle w10: c3180.88,1899.62 r10
  circle w10: c3930.88,1899.62 r10
  circle w10: c4680.88,1899.62 r10
  circle w10: c4899.62,1149.62 r10
  circle w10: c4149.62,1149.62 r10
  circle w10: c3399.62,1149.62 r10
  circle w10: c2649.62,1149.62 r10
  circle w10: c1899.62,1149.62 r10
  circle w10: c774.62,1149.62 r10
  circle w10: c1149.62,399.62 r10
  circle w10: c399.62,399.62 r10
  circle w10: c1899.62,399.62 r10
  circle w10: c2649.62,399.62 r10
  circle w10: c3399.62,399.62 r10
  circle w10: c4649.62,399.62 r10
  circle w0.5: c5566.6,959.53 r72.83
  circle w0.5: c108.36,777.65 r72.83
  circle w0.5: c777.65,3690.89 r72.83
  circle w0.5: c3769.78,3690.89 r72.83
  lines w0.5: 0.25,177.75 ccw(c177.75,177.75) 177.75,0.25 5414.83,0.25 ccw(c5414.83,177.75) 5585.7,129.71 5746.88,702.98 ccw(c5576,751.02) 5740.58,817.51 4580.83,3687.99 ccw(c4416.26,3621.5) 4416.26,3799 177.75,3799 ccw(c177.75,3621.5) 0.25,3621.5 0.25,177.75

## Text inside footprints (layer, text, board x,y; h text height)
S1_1: Top Overlay "+      -" at 269.62,3179.62 h35; Bottom Overlay "+      -" at 269.62,3179.62 h35
S1_2: Top Overlay "+      -" at 1019.62,3179.62 h35; Bottom Overlay "+      -" at 1019.62,3179.62 h35
S1_3: Top Overlay "+      -" at 1769.62,3179.62 h35; Bottom Overlay "+      -" at 1769.62,3179.62 h35
S1_4: Top Overlay "+      -" at 2519.62,3179.62 h35; Bottom Overlay "+      -" at 2519.62,3179.62 h35
S1_5: Top Overlay "+      -" at 3269.62,3179.62 h35; Bottom Overlay "+      -" at 3269.62,3179.62 h35
S1_6: Top Overlay "+      -" at 4019.62,3179.62 h35; Bottom Overlay "+      -" at 4019.62,3179.62 h35
S1_7: Top Overlay "+      -" at 410.25,2429.62 h35; Bottom Overlay "+      -" at 410.25,2429.62 h35
S1_8: Top Overlay "+      -" at 1300.88,2429.62 h35; Bottom Overlay "+      -" at 1300.88,2429.62 h35
S1_9: Top Overlay "+      -" at 2050.88,2429.62 h35; Bottom Overlay "+      -" at 2050.88,2429.62 h35
S1_10: Top Overlay "+      -" at 2800.88,2429.62 h35; Bottom Overlay "+      -" at 2800.88,2429.62 h35
S1_11: Top Overlay "+      -" at 3550.88,2429.62 h35; Bottom Overlay "+      -" at 3550.88,2429.62 h35
S1_12: Top Overlay "+      -" at 4300.88,2429.62 h35; Bottom Overlay "+      -" at 4300.88,2429.62 h35
S1_13: Top Overlay "+      -" at 535.25,1679.62 h35; Bottom Overlay "+      -" at 535.25,1679.62 h35
S1_14: Top Overlay "+      -" at 1550.88,1679.62 h35; Bottom Overlay "+      -" at 1550.88,1679.62 h35
S1_15: Top Overlay "+      -" at 2300.88,1679.62 h35; Bottom Overlay "+      -" at 2300.88,1679.62 h35
S1_16: Top Overlay "+      -" at 3050.88,1679.62 h35; Bottom Overlay "+      -" at 3050.88,1679.62 h35
S1_17: Top Overlay "+      -" at 3800.88,1679.62 h35; Bottom Overlay "+      -" at 3800.88,1679.62 h35
S1_18: Top Overlay "+      -" at 4550.88,1679.62 h35; Bottom Overlay "+      -" at 4550.88,1679.62 h35
S1_19: Top Overlay "+      -" at 644.62,929.62 h30; Bottom Overlay "+      -" at 644.62,929.62 h30
S1_20: Top Overlay "+      -" at 1769.62,929.62 h35; Bottom Overlay "+      -" at 1769.62,929.62 h35
S1_21: Top Overlay "+      -" at 2519.62,929.62 h35; Bottom Overlay "+      -" at 2519.62,929.62 h35
S1_22: Top Overlay "+      -" at 3269.62,929.62 h35; Bottom Overlay "+      -" at 3269.62,929.62 h35
S1_23: Top Overlay "+      -" at 4019.62,929.62 h35; Bottom Overlay "+      -" at 4019.62,929.62 h35
S1_24: Top Overlay "+      -" at 4769.62,929.62 h35; Bottom Overlay "+      -" at 4769.62,929.62 h35
S1_25: Top Overlay "+      -" at 269.62,179.62 h35; Bottom Overlay "+      -" at 269.62,179.62 h35
S1_26: Top Overlay "+      -" at 1019.62,179.62 h35; Bottom Overlay "+      -" at 1019.62,179.62 h35
S1_27: Top Overlay "+      -" at 1769.62,179.62 h35; Bottom Overlay "+      -" at 1769.62,179.62 h35
S1_28: Top Overlay "+      -" at 2519.62,179.62 h35; Bottom Overlay "+      -" at 2519.62,179.62 h35
S1_29: Top Overlay "+      -" at 3269.62,179.62 h35; Bottom Overlay "+      -" at 3269.62,179.62 h35
S1_30: Top Overlay "+      -" at 4519.62,179.62 h30; Bottom Overlay "+      -" at 4519.62,179.62 h30